# Altium PCB Front Power Distribution.PcbDoc (part 1 of 2)
Units mm, origin at the board's own origin, x right, y up, seen from the top; angles counter-clockwise.
Board outline 77 x 90 mm, 2 copper layers (Top Layer, Bottom Layer); 113 components, 89 nets, 463 pads, 547 vias.
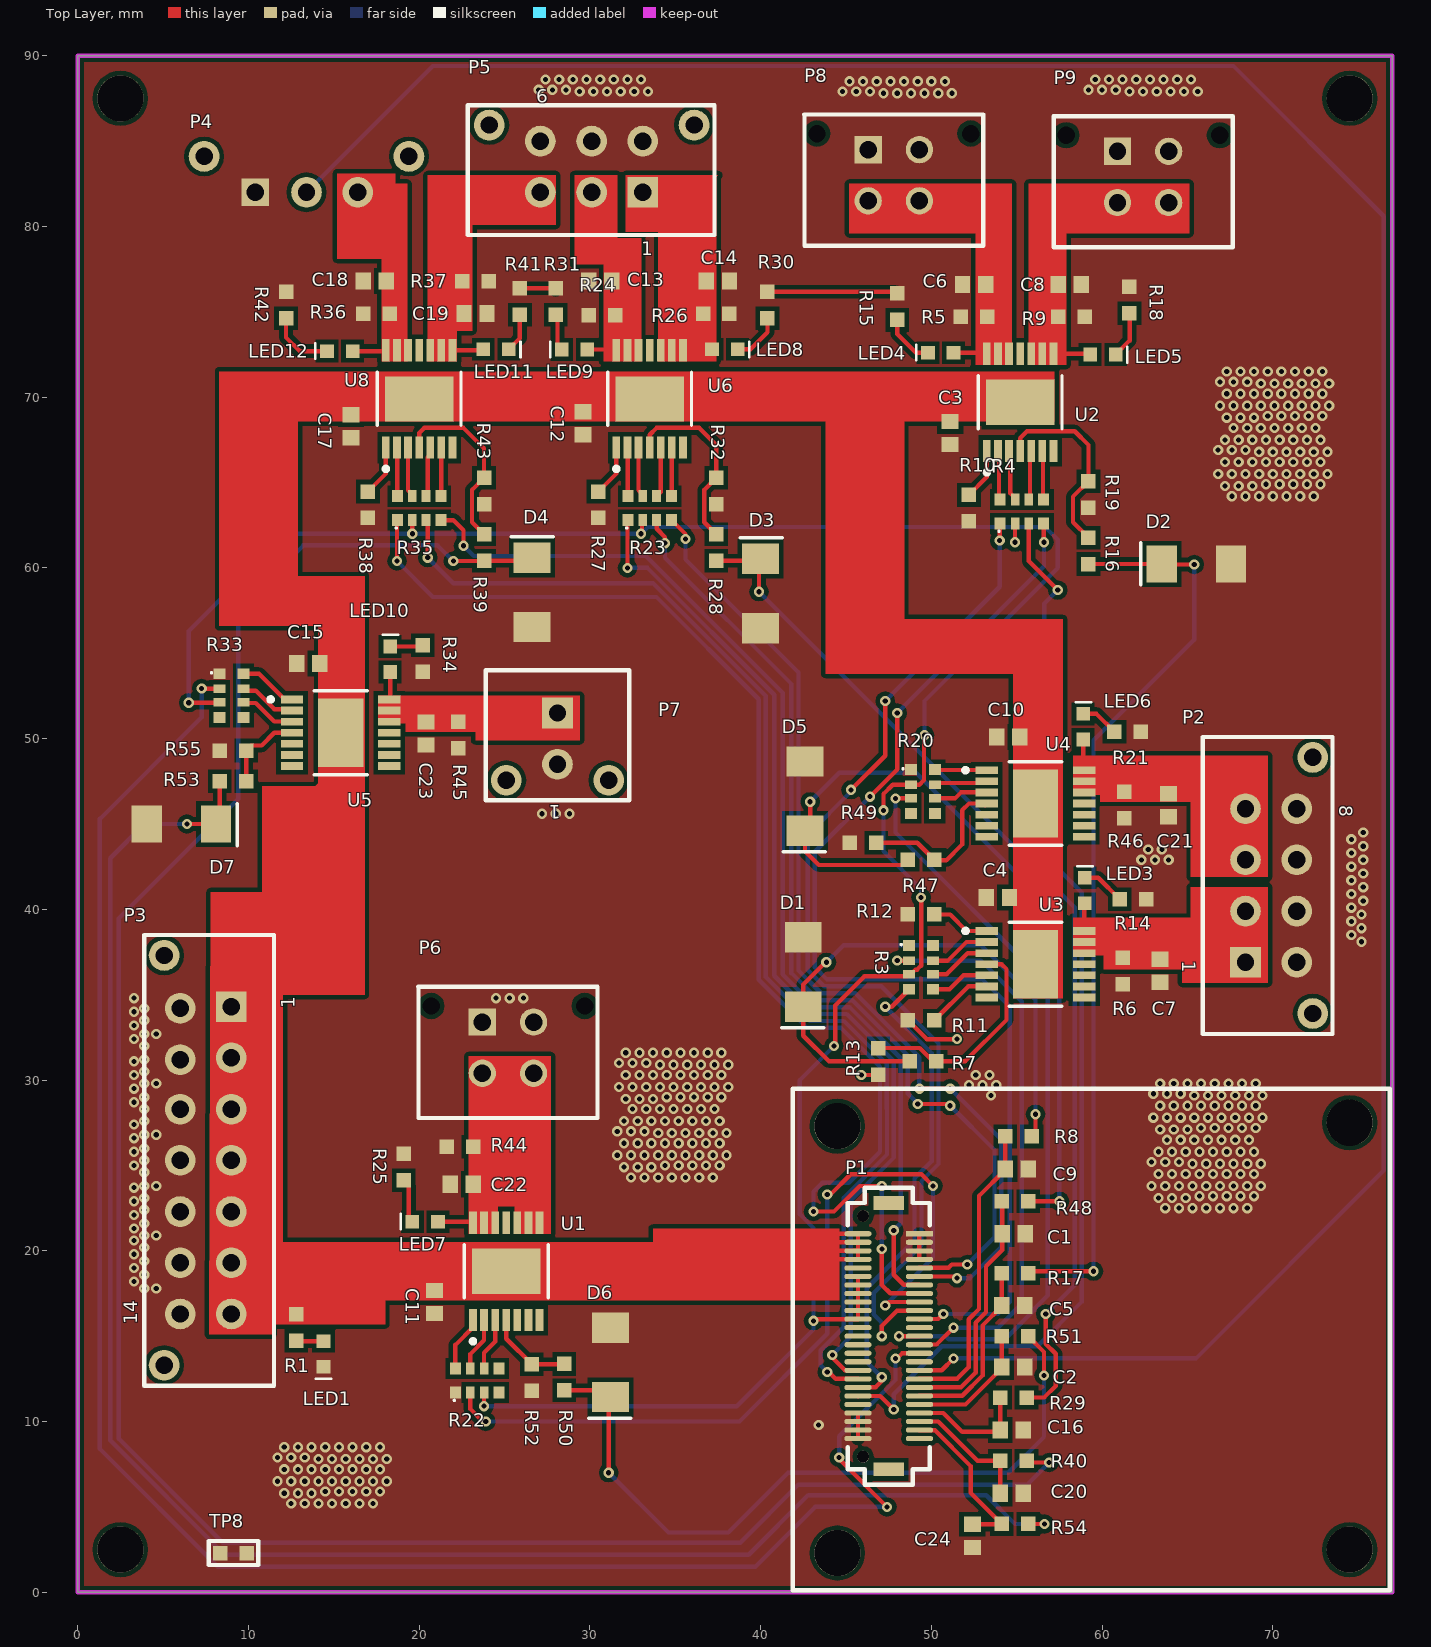
[diagram p0: Top Layer view]
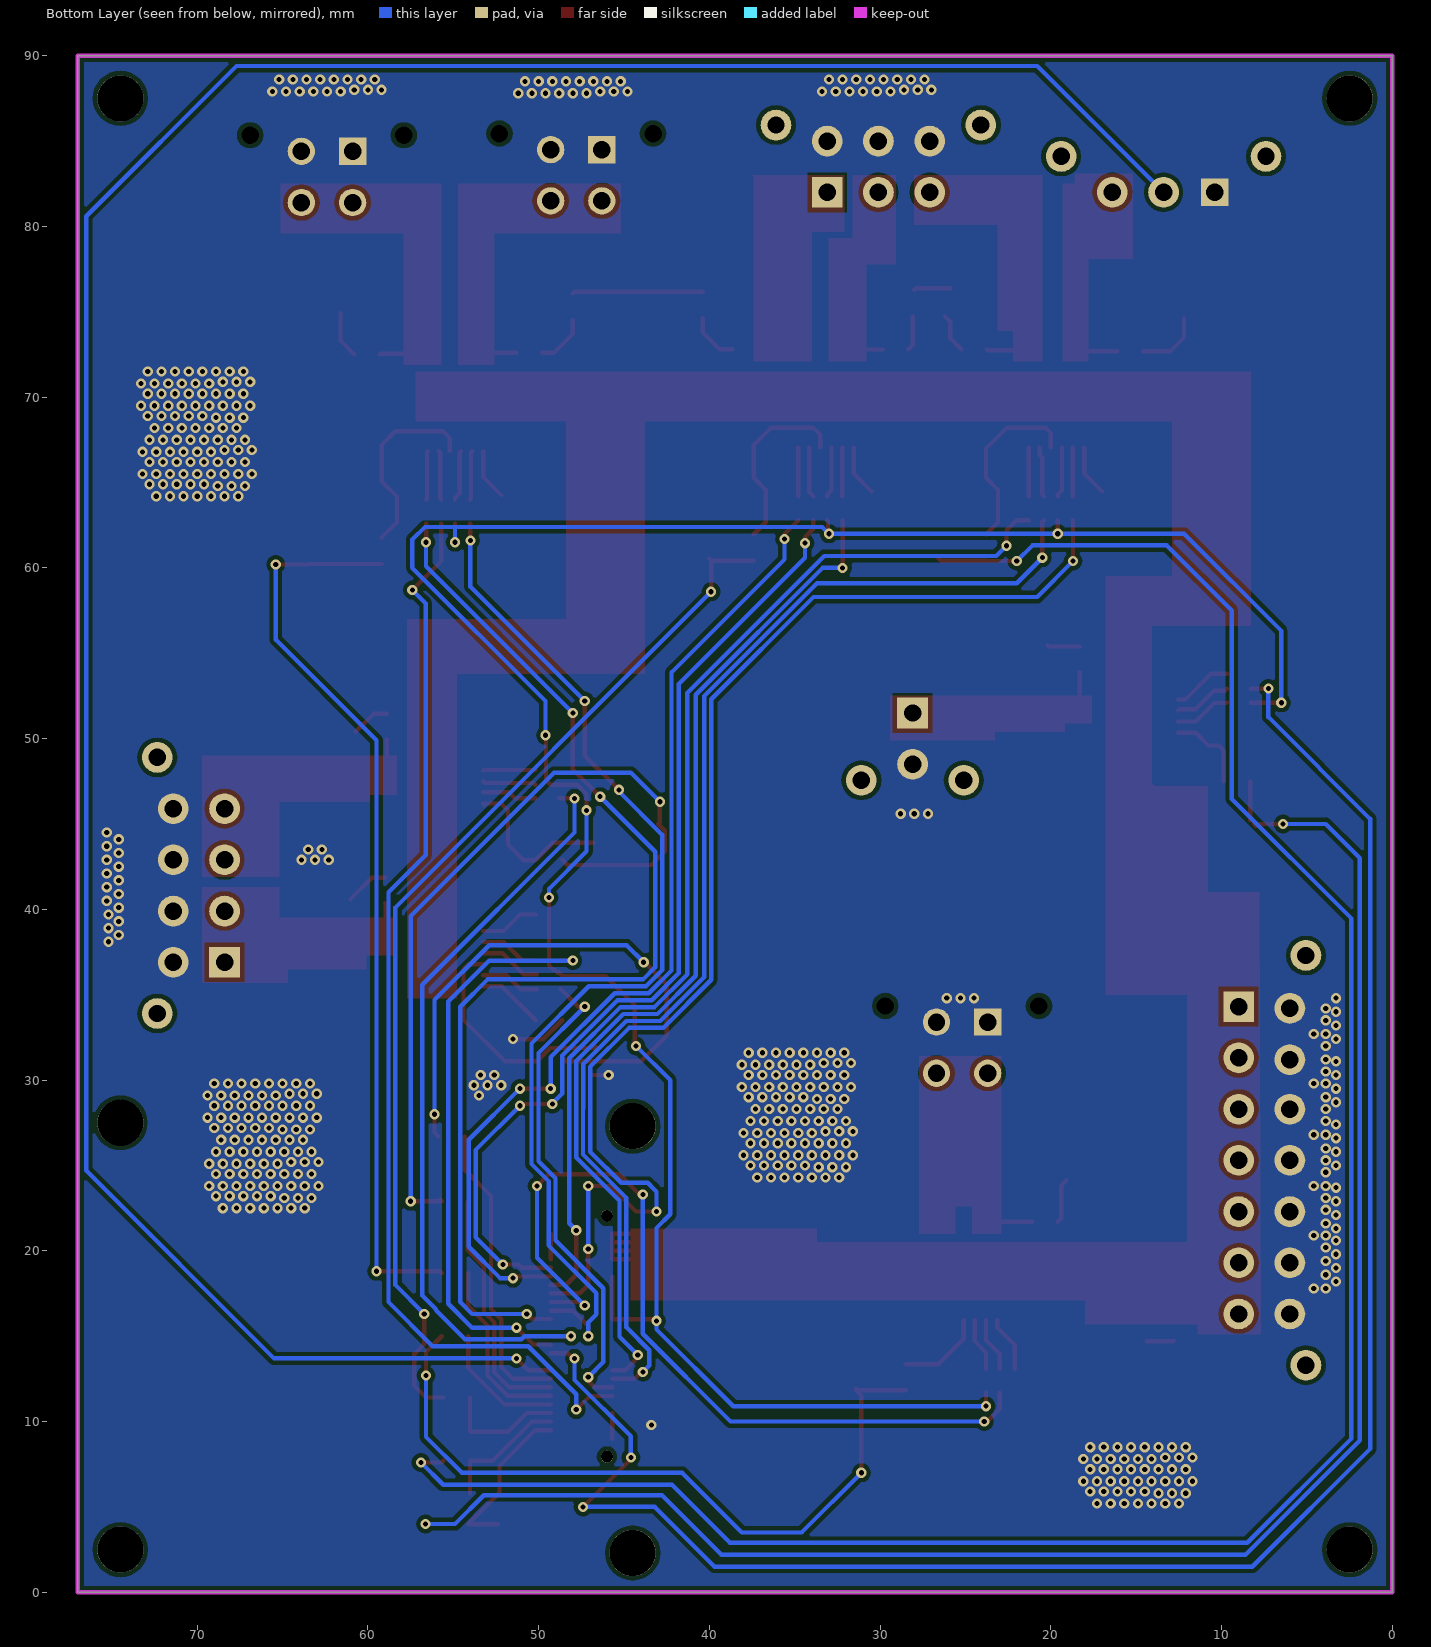
[diagram p1: Bottom Layer view, seen from below]
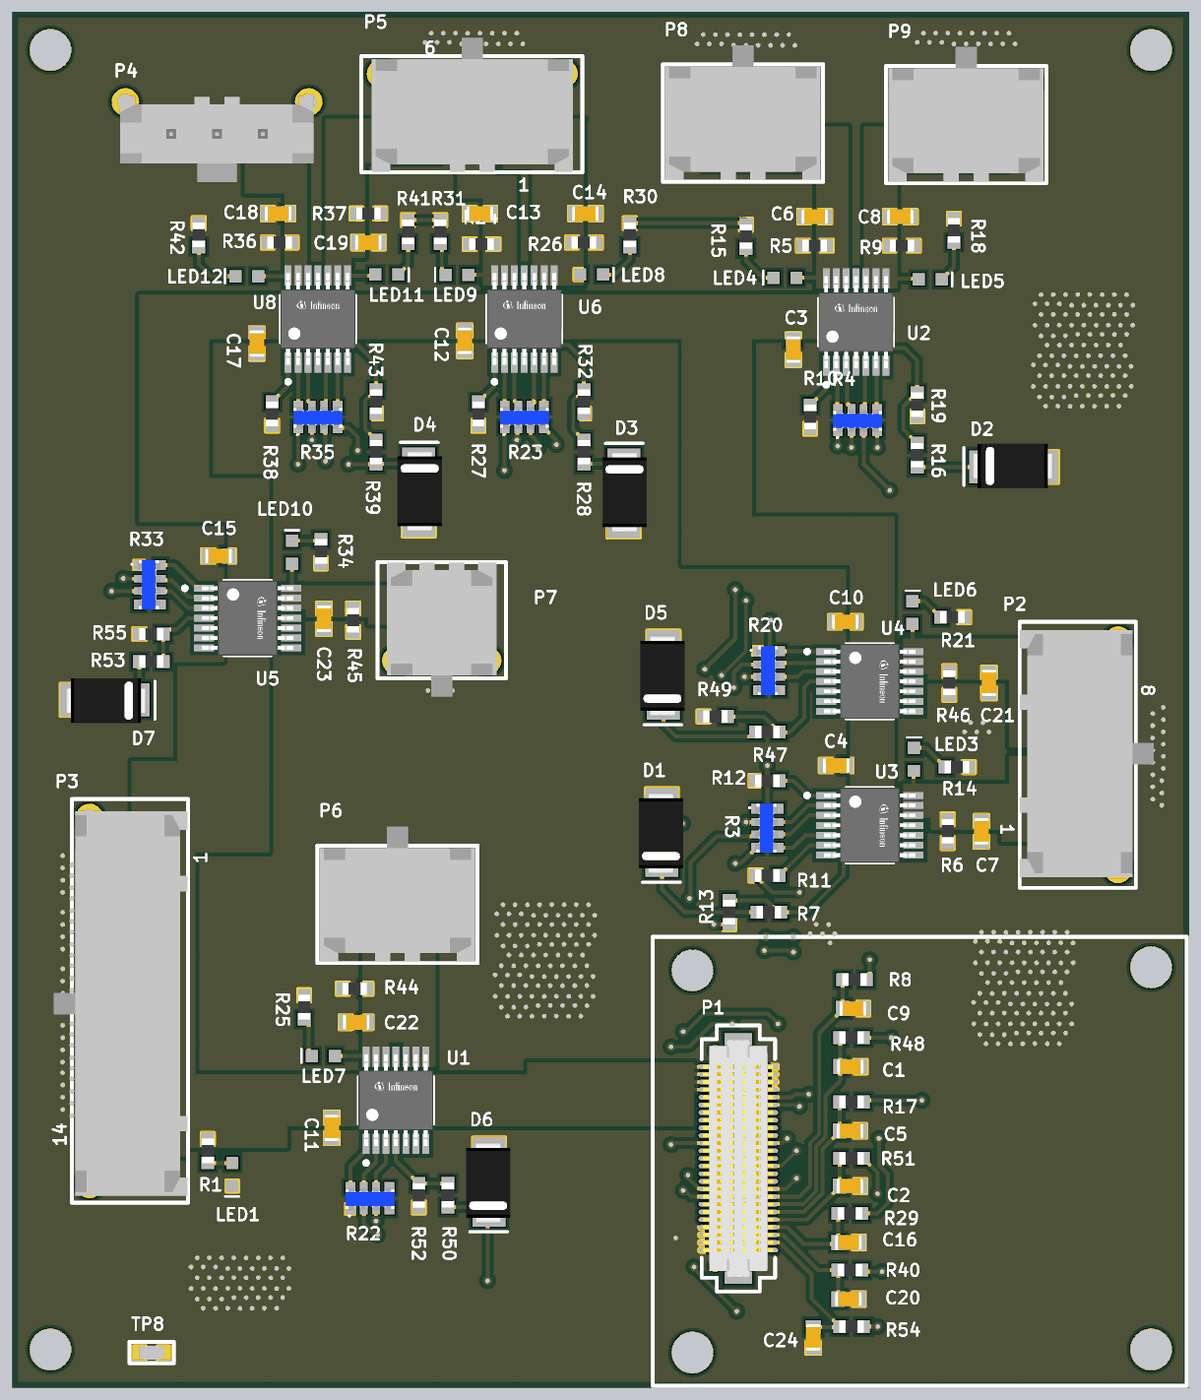
[diagram p2: 3D render of the assembled board from above, using the file's embedded part models]

## Layer stack, top to bottom
Top Solder: solder mask 0.0102, Solder Resist, Dk 3.5
Top Layer: signal copper 0.0356
Dielectric 1: dielectric 0.32, FR-4, Dk 4.8
Bottom Layer: signal copper 0.0356
Bottom Solder: solder mask 0.0102, Solder Resist, Dk 3.5

## Board outline
0,0 77,0 77,90 0,90

## Design rules (kind name [scope] priority, off if disabled: settings)
Clearance [All] p1: gap=0.254 ignorepadtopadclearanceinfootprint=FALSE except(0: Arc-Text Arc-Hole Track-Text Track-Hole SMDPad-Text SMDPad-Hole THPad-Text THPad-Hole Via-Text Via-Hole Fill-Text Fill-Hole Poly-Text Poly-Hole Region-Text Region-Hole Text-Text Text-Hole; 0.152: Arc-Arc Arc-Track Arc-SMDPad Track-Track Track-SMDPad SMDPad-SMDPad)
PolygonConnect [All] p1: connectstyle=Direct reliefconductorwidth=0.254 reliefentries=4 polygonreliefangle="90 Angle" airgapwidth=0.254
RoutingVias [All] p1: holewidth=0.3 width=0.6 viastyle="Through Hole" minholewidth=0.3 minwidth=0.6 maxholewidth=0.3 maxwidth=0.6
SolderMaskExpansion [All] p1: expansion=0.102
Width [All] p1: maxlimit=0.254 minlimit=0.254 preferedwidth=0.254
30 further rules are at their usual default settings.

## Classes and differential pairs
component class "Power Distribution - Steering, Pedal, Center Console, and Fan": C2 C11 C12 C13 C14 C15 C16 C17 C18 C19 C20 C22 C23 C24 D3 D4 D6 D7 LED7 LED8 LED9 LED10 LED11 LED12 P4 P5 P6 P7 R22 R23 R24 R25 R26 R27 R28 R29 R30 R31 R32 R33 R34 R35 R36 R37 R38 R39 R40 R41 R42 R43 R44 R45 R50 R51 R52 R53 R54 R55 U1 U5 U6 U8
component class "Power Distribution - Front Lights": C1 C3 C4 C5 C6 C7 C8 C9 C10 C21 D1 D2 D5 LED3 LED4 LED5 LED6 P2 P8 P9 R3 R4 R5 R6 R7 R8 R9 R10 R11 R12 R13 R14 R15 R16 R17 R18 R19 R20 R21 R46 R47 R48 R49 U2 U3 U4
component class Controller_Board_Interface: LED1 P1 P3 R1 TP8

## Components (designator, comment, footprint, x,y, rotation, side; value= is the part's Value field where it differs from the comment)
C1 "CAP CER 220PF 50V C0G/NP0 0603" "CAP, 0603" 54.825,21 r0 top
C2 "CAP CER 220PF 50V C0G/NP0 0603" "CAP, 0603" 54.8,13.2 r0 top
C3 "CAP CER 0.1UF 50V 10% X7R 0603" "CAP, 0603" 51.1,67.9 r270 top
C4 "CAP CER 0.1UF 50V 10% X7R 0603" "CAP, 0603" 53.9,40.7 r180 top
C5 "CAP CER 220PF 50V C0G/NP0 0603" "CAP, 0603" 54.8,16.8 r0 top
C6 "CAP CER 10nF 50V 5% X7R 0603" "CAP, 0603" 52.5,76.6 r180 top
C7 "CAP CER 10nF 50V 5% X7R 0603" "CAP, 0603" 63.4,36.4 r270 top
C8 "CAP CER 10nF 50V 5% X7R 0603" "CAP, 0603" 58.1,76.6 r0 top
C9 "CAP CER 220PF 50V C0G/NP0 0603" "CAP, 0603" 55,24.8 r0 top
C10 "CAP CER 0.1UF 50V 10% X7R 0603" "CAP, 0603" 54.5,50.1 r180 top
C11 "CAP CER 0.1UF 50V 10% X7R 0603" "CAP, 0603" 20.9,17 r270 top
C12 "CAP CER 0.1UF 50V 10% X7R 0603" "CAP, 0603" 29.6,68.475 r270 top
C13 "CAP CER 10nF 50V 5% X7R 0603" "CAP, 0603" 30.6,76.8 r180 top
C14 "CAP CER 10nF 50V 5% X7R 0603" "CAP, 0603" 37.5,76.8 r0 top
C15 "CAP CER 0.1UF 50V 10% X7R 0603" "CAP, 0603" 13.5,54.4 r180 top
C16 "CAP CER 220PF 50V C0G/NP0 0603" "CAP, 0603" 54.7,9.5 r0 top
C17 "CAP CER 0.1UF 50V 10% X7R 0603" "CAP, 0603" 16,68.3 r270 top
C18 "CAP CER 10nF 50V 5% X7R 0603" "CAP, 0603" 17.4,76.8 r180 top
C19 "CAP CER 10nF 50V 5% X7R 0603" "CAP, 0603" 23.3,74.9 r0 top
C20 "CAP CER 220PF 50V C0G/NP0 0603" "CAP, 0603" 54.7,5.8 r0 top
C21 "CAP CER 10nF 50V 5% X7R 0603" "CAP, 0603" 63.9,46.1 r270 top
C22 "CAP CER 10nF 50V 5% X7R 0603" "CAP, 0603" 22.5,23.9 r180 top
C23 "CAP CER 10nF 50V 5% X7R 0603" "CAP, 0603" 20.4,50.3 r270 top
C24 "CAP CER 220PF 50V C0G/NP0 0603" "CAP, 0603" 52.4,3.3 r270 top
D1 "DIODE ZENER 5.1V 500MW SOD123" "DO-214AA Diode" 42.5,38.364 r270 top
D2 "DIODE ZENER 5.1V 500MW SOD123" "DO-214AA Diode" 67.553,60.225 r180 top
D3 "DIODE ZENER 5.1V 500MW SOD123" "DO-214AA Diode" 40,56.472 r90 top
D4 "DIODE ZENER 5.1V 500MW SOD123" "DO-214AA Diode" 26.6,56.536 r90 top
D5 "DIODE ZENER 5.1V 500MW SOD123" "DO-214AA Diode" 42.6,48.664 r270 top
D6 "DIODE ZENER 5.1V 500MW SOD123" "DO-214AA Diode" 31.2,15.5 r270 top
D7 "DIODE ZENER 5.1V 500MW SOD123" "DO-214AA Diode" 4.036,45 r0 top
LED1 "LED GREEN CLEAR 2V 0603" LED_0603 14.39,14.65 r270 top
LED3 "LED YELLOW CLEAR 2.1V 0603" LED_0603 59,40.4 r90 top
LED4 "LED YELLOW CLEAR 2.1V 0603" LED_0603 51.25,72.61 r180 top
LED5 "LED YELLOW CLEAR 2.1V 0603" LED_0603 59.35,72.49 r0 top
LED6 "LED YELLOW CLEAR 2.1V 0603" LED_0603 58.9,50 r90 top
LED7 "LED YELLOW CLEAR 2.1V 0603" LED_0603 21.05,21.71 r180 top
LED8 "LED YELLOW CLEAR 2.1V 0603" LED_0603 37.2,72.8 r0 top
LED9 "LED YELLOW CLEAR 2.1V 0603" LED_0603 29.8,72.8 r180 top
LED10 "LED YELLOW CLEAR 2.1V 0603" LED_0603 18.31,53.95 r90 top
LED11 "LED YELLOW CLEAR 2.1V 0603" LED_0603 23.8,72.8 r0 top
LED12 "LED YELLOW CLEAR 2.1V 0603" LED_0603 16.05,72.71 r180 top
P1 "CONN 50POS Bergstak Plug 0.02\"" "CONN, Bergstak 50 Pos Plug" 47.5,15 r0 top
P2 "CONN 8POS MICRO-FIT 3mm" "CONN, 8POS MICRO-FIT" 68.4,36.9 r270 top
P3 "CONN 14POS MICRO-FIT 3mm" "CONN, 14POS MICRO-FIT 3mm" 9,34.3 r90 top
P4 "CONN 3POS MICROFIT" "CONN, 3 POS MICROFIT" 13.4,82 r90 top
P5 "CONN 6POS MICRO-FIT 3mm" "CONN, 6POS MICRO-FIT 3MM" 33.1,82 r0 top
P6 "CONN 4POS MICRO-FIT 3mm" "CONN 4POS MICROFIT (2x2)" 26.7,30.4 r0 top
P7 "CONN 2POS MICRO-FIT 3mm" "CONN, 2POS MICRO-FIT" 28.1,51.5 r180 top
P8 "CONN 4POS MICRO-FIT 3mm" "CONN 4POS MICROFIT (2x2)" 49.3,81.5 r0 top
P9 "CONN 4POS MICRO-FIT 3mm" "CONN 4POS MICROFIT (2x2)" 63.9,81.4 r0 top
R1 "RES 4.7K OHM 1% 1/10W 0603" "RES, 0603" 12.8,15.5 r270 top
R3 "RES ARRAY 4 RES 4.7K OHM 1206" "RES ARRAY 4RES 1206" 49.4,36.6 r0 top
R4 "RES ARRAY 4 RES 4.7K OHM 1206" "RES ARRAY 4RES 1206" 55.3,63.3 r90 top
R5 "RES 47K OHM 1% 1/10W 0603" "RES, 0603" 52.5,74.7 r180 top
R6 "RES 47K OHM 1% 1/10W 0603" "RES, 0603" 61.2,36.4 r270 top
R7 "RES 4.7K OHM 1% 1/10W 0603" "RES, 0603" 49.5,31.1 r0 top
R8 "RES 4.7K OHM 1% 1/10W 0603" "RES, 0603" 55.1,26.7 r0 top
R9 "RES 47K OHM 1% 1/10W 0603" "RES, 0603" 58.2,74.7 r0 top
R10 "RES 47K OHM 1% 1/10W 0603" "RES, 0603" 52.2,63.5 r270 top
R11 "RES 10K OHM 1% 1/10W 0603" "RES, 0603" 49.4,33.504 r180 top
R12 "RES 47K OHM 1% 1/10W 0603" "RES, 0603" 49.4,39.7 r180 top
R13 "RES 1.21K OHM 1% 1/10W 0603" "RES, 0603" 46.9,31.1 r270 top
R14 "RES 10K OHM 1% 1/10W 0603" "RES, 0603" 61.8,40.6 r0 top
R15 "RES 10K OHM 1% 1/10W 0603" "RES, 0603" 48,75.3 r90 top
R16 "RES 4.7K OHM 1% 1/10W 0603" "RES, 0603" 59.2,61 r90 top
R17 "RES 4.7K OHM 1% 1/10W 0603" "RES, 0603" 54.9,18.7 r0 top
R18 "RES 10K OHM 1% 1/10W 0603" "RES, 0603" 61.6,75.7 r90 top
R19 "RES 1.21K OHM 1% 1/10W 0603" "RES, 0603" 59.2,64.3 r270 top
R20 "RES ARRAY 4 RES 4.7K OHM 1206" "RES ARRAY 4RES 1206" 49.5,46.9 r0 top
R21 "RES 10K OHM 1% 1/10W 0603" "RES, 0603" 61.5,50.4 r0 top
R22 "RES ARRAY 4 RES 4.7K OHM 1206" "RES ARRAY 4RES 1206" 23.4,12.4 r90 top
R23 "RES ARRAY 4 RES 4.7K OHM 1206" "RES ARRAY 4RES 1206" 33.5,63.5 r90 top
R24 "RES 47K OHM 1% 1/10W 0603" "RES, 0603" 30.7,74.8 r180 top
R25 "RES 10K OHM 1% 1/10W 0603" "RES, 0603" 19.1,24.9 r90 top
R26 "RES 47K OHM 1% 1/10W 0603" "RES, 0603" 37.4,74.9 r0 top
R27 "RES 47K OHM 1% 1/10W 0603" "RES, 0603" 30.5,63.7 r270 top
R28 "RES 4.7K OHM 1% 1/10W 0603" "RES, 0603" 37.4,61.2 r90 top
R29 "RES 4.7K OHM 1% 1/10W 0603" "RES, 0603" 54.8,11.404 r0 top
R30 "RES 10K OHM 1% 1/10W 0603" "RES, 0603" 40.4,75.4 r90 top
R31 "RES 10K OHM 1% 1/10W 0603" "RES, 0603" 28,75.6 r90 top
R32 "RES 1.21K OHM 1% 1/10W 0603" "RES, 0603" 37.4,64.5 r270 top
R33 "RES ARRAY 4 RES 4.7K OHM 1206" "RES ARRAY 4RES 1206" 9,52.52 r0 top
R34 "RES 10K OHM 1% 1/10W 0603" "RES, 0603" 20.2,54.7 r270 top
R35 "RES ARRAY 4 RES 4.7K OHM 1206" "RES ARRAY 4RES 1206" 20,63.5 r90 top
R36 "RES 47K OHM 1% 1/10W 0603" "RES, 0603" 17.5,74.9 r180 top
R37 "RES 47K OHM 1% 1/10W 0603" "RES, 0603" 23.3,76.8 r0 top
R38 "RES 47K OHM 1% 1/10W 0603" "RES, 0603" 17,63.7 r270 top
R39 "RES 4.7K OHM 1% 1/10W 0603" "RES, 0603" 23.8,61.2 r90 top
R40 "RES 4.7K OHM 1% 1/10W 0603" "RES, 0603" 54.8,7.7 r0 top
R41 "RES 10K OHM 1% 1/10W 0603" "RES, 0603" 25.9,75.6 r90 top
R42 "RES 10K OHM 1% 1/10W 0603" "RES, 0603" 12.2,75.4 r90 top
R43 "RES 1.21K OHM 1% 1/10W 0603" "RES, 0603" 23.8,64.5 r270 top
R44 "RES 47K OHM 1% 1/10W 0603" "RES, 0603" 22.4,26.1 r180 top
R45 "RES 47K OHM 1% 1/10W 0603" "RES, 0603" 22.3,50.2 r270 top
R46 "RES 47K OHM 1% 1/10W 0603" "RES, 0603" 61.3,46.1 r270 top
R47 "RES 4.7K OHM 1% 1/10W 0603" "RES, 0603" 49.4,42.9 r0 top
R48 "RES 4.7K OHM 1% 1/10W 0603" "RES, 0603" 54.9,22.9 r0 top
R49 "RES 1.21K OHM 1% 1/10W 0603" "RES, 0603" 46,43.9 r180 top
R50 "RES 4.7K OHM 1% 1/10W 0603" "RES, 0603" 28.5,12.6 r90 top
R51 "RES 4.7K OHM 1% 1/10W 0603" "RES, 0603" 54.9,15 r0 top
R52 "RES 1.21K OHM 1% 1/10W 0603" "RES, 0603" 26.6,12.575 r270 top
R53 "RES 4.7K OHM 1% 1/10W 0603" "RES, 0603" 9.1,47.5 r0 top
R54 "RES 4.7K OHM 1% 1/10W 0603" "RES, 0603" 54.904,4 r0 top
R55 "RES 1.21K OHM 1% 1/10W 0603" "RES, 0603" 9.1,49.3 r180 top
TP8 "Test Point 0603 SMD" "TEST POINT 0603 SMD" 8.35,2.3 r0 top
U1 "IC LOAD SWITCH BTS70081EPPXUMA1" "IC LOAD SWITCH PG-TSDSO-14-22" 25.1,18.8 r90 top
U2 "IC LOAD SWITCH BTS7200-2EPA PG-TSDSO-14_1" "IC LOAD SWITCH PG-TSDSO-14-22" 55.2,69.7 r90 top
U3 "IC LOAD SWITCH BTS7200-2EPA PG-TSDSO-14_1" "IC LOAD SWITCH PG-TSDSO-14-22" 56.1,36.787 r0 top
U4 "IC LOAD SWITCH BTS70401EPA PG-TSDSO-14-22" "IC LOAD SWITCH PG-TSDSO-14-22" 56.1,46.2 r0 top
U5 "IC LOAD SWITCH BTS70401EPA PG-TSDSO-14-22" "IC LOAD SWITCH PG-TSDSO-14-22" 15.4,50.344 r0 top
U6 "IC LOAD SWITCH BTS7200-2EPA PG-TSDSO-14_1" "IC LOAD SWITCH PG-TSDSO-14-22" 33.5,69.9 r90 top
U8 "IC LOAD SWITCH BTS7200-2EPA PG-TSDSO-14_1" "IC LOAD SWITCH PG-TSDSO-14-22" 20,69.9 r90 top

## Footprints (in the part's own frame and the unit in brackets; to place one, negate y for a bottom-side part, rotate by r counter-clockwise, add the part's x,y. Pads: shape width x height; smd on the part's side, far side on the other; paste and mask are expansions set on the pad)
"CAP, 0603" [mm] "Chip Capacitor, 2-Leads, Body 1.60x0.81mm, IPC Medium Density"
  rect 0.9x1 smd mask+0.076: 1(-0.675,0) 2(0.675,0)
  body extent -0.87,-0.48 0.87,0.48, height 0.9
"CONN 4POS MICROFIT (2x2)" [mm]
  round 1.6 hole 1.02: 1(0,0) 2(-3,0) 3(0,3)
  rect 1.6x1.6 hole 1.02: 4(-3,3)
  round 0 hole 1.02: ""(-6,3.94) ""(3,3.94)
  silkscreen extent -6.75,-2.63 3.75,5.06, body extent -6.57,-2.47 3.57,6.29, height 9.91
"CONN, 2POS MICRO-FIT" [mm]
  round 1.8 hole 1.02: 0(-3,3.94) 0(3,3.94) 2(0,3)
  rect 1.8x1.8 hole 1.02: 1(0,0)
  silkscreen extent -4.2,-2.5 4.2,5.1, body extent -3.57,-2.47 3.58,6.3, height 9.95
"CONN, 3 POS MICROFIT" [mm]
  round 1.8 hole 1.02: 0(2.1,6) 0(2.1,-6) 2(0,0) 3(0,-3)
  rect 1.6x1.6 hole 1.02: 1(0,3)
  body extent -3.14,-6.32 2.47,6.33, height 9.95
"CONN, 6POS MICRO-FIT 3MM" [mm]
  round 1.8 hole 1.02: 0(-9,3.94) 0(3,3.94) 2(-3,0) 3(-6,0) 4(0,3) 5(-3,3) 6(-6,3)
  rect 1.8x1.8 hole 1.02: 1(0,0)
  silkscreen extent -10.25,-2.5 4.2,5.1, body extent -9.57,-2.47 3.58,6.3, height 10.15
"CONN, 8POS MICRO-FIT" [mm]
  round 1.8 hole 1.02: 0(-12,3.94) 0(3,3.94) 2(-3,0) 3(-6,0) 4(-9,0) 5(0,3) 6(-3,3) 7(-6,3) 8(-9,3)
  rect 1.8x1.8 hole 1.02: 1(0,0)
  silkscreen extent -13.2,-2.5 4.2,5.1, body extent -12.65,-2.48 3.5,6.29, height 9.95
"CONN, 14POS MICRO-FIT 3mm" [mm]
  round 1.8 hole 1.02: 0(-21,3.94) 0(3,3.94) 2(-3,0) 3(-6,0) 4(-9,0) 5(-12,0) 6(-15,0) 7(-18,0) 8(-0.1,3) 9(-3.1,3) 10(-6,3) 11(-9,3) 12(-12,3) 13(-15,3) 14(-18,3)
  rect 1.8x1.8 hole 1.02: 1(0,0)
  silkscreen extent -22.2,-2.5 4.2,5.1, body extent -21.75,-2.48 3.4,6.28, height 9.95
"CONN, Bergstak 50 Pos Plug" [mm] "Bergstak 50 Position Plug"
  rect 1.6x0.3 smd: 1(1.8,6)
  oval 1.6x0.3 smd: 2(1.8,5.5) 3(1.8,5) 4(1.8,4.5) 5(1.8,4) 6(1.8,3.5) 7(1.8,3) 8(1.8,2.5) 9(1.8,2) 10(1.8,1.5) 11(1.8,1) 12(1.8,0.5) 13(1.8,0) 14(1.8,-0.5) 15(1.8,-1) 16(1.8,-1.5) 17(1.8,-2) 18(1.8,-2.5) 19(1.8,-3) 20(1.8,-3.5) 21(1.8,-4) 22(1.8,-4.5) 23(1.8,-5) 24(1.8,-5.5) 25(1.8,-6) 26(-1.8,-6) 27(-1.8,-5.5) 28(-1.8,-5) 29(-1.8,-4.5) 30(-1.8,-4) 31(-1.8,-3.5) 32(-1.8,-3) 33(-1.8,-2.5) 34(-1.8,-2) 35(-1.8,-1.5) 36(-1.8,-1) 37(-1.8,-0.5) 38(-1.8,0) 39(-1.8,0.5) 40(-1.8,1) 41(-1.8,1.5) 42(-1.8,2) 43(-1.8,2.5) 44(-1.8,3) 45(-1.8,3.5) 46(-1.8,4) 47(-1.8,4.5) 48(-1.8,5) 49(-1.8,5.5) 50(-1.8,6)
  round 0.7 hole 0.7: ""(-1.5,-7.05) ""(-1.5,7.05)
  rect 1.8x0.8 smd: ""(0,-7.8) ""(0,7.8)
  silkscreen extent -2.4,-8.7 2.4,8.7, body extent -2.3,-7.75 2.3,7.75, height 4.2
"DO-214AA Diode" [mil] "Zener Diode 16V 5W SMBJ5353B-TP"
  rect 70x85 smd: 1(0,0) 2(160,0)
  silkscreen extent 209,-50 209,47, body extent -21,-60 187,55, height 95
"IC LOAD SWITCH PG-TSDSO-14-22" [mm] "SOP,0.65mm pitch;14 pin,3.90mm W X 4.90mm L X 1.15mm H body (w/thermal tab)"
  rect 1.31x0.45 smd paste+0 mask+0: 1(-2.85,1.95) 2(-2.85,1.3) 3(-2.85,0.65) 4(-2.85,0) 5(-2.85,-0.65) 6(-2.85,-1.3) 7(-2.85,-1.95) 8(2.85,-1.95) 9(2.85,-1.3) 10(2.85,-0.65) 11(2.85,0) 12(2.85,0.65) 13(2.85,1.3) 14(2.85,1.95)
  rect 2.65x4 smd paste-2.65 mask+0: 15(0,0)
  silkscreen extent -4.22,-2.45 1.55,2.45, body extent -3,-2.45 3,2.45, height 1.16
LED_0603 [mm]
  rect 0.8x0.8 smd: 1(-0.05,0.01) 2(1.45,0.01)
  silkscreen extent 2.13,-0.46 2.13,0.45, body extent -0.09,-0.39 1.51,0.41, height 0.8
"RES ARRAY 4RES 1206" [mm] "Chip Array, Flat, 8-Leads, Pitch 0.80mm,  Body 3.20x1.60mm,  IPC Medium Density"
  rect 0.7x0.64 smd: 1(-0.7,1.28) 4(-0.7,-1.28) 5(0.7,-1.28) 8(0.7,1.28)
  rect 0.7x0.5 smd: 2(-0.7,0.4) 3(-0.7,-0.4) 6(0.7,-0.4) 7(0.7,0.4)
  silkscreen extent -1.21,1.29 -1.11,1.39, body extent -0.81,-1.6 0.69,1.6, height 0.45
"RES, 0603" [mm] "Chip Resistor, 2-Leads, Body 1.60x0.80mm, IPC Medium Density"
  rect 0.85x0.85 smd: 1(-0.775,0) 2(0.775,0)
  body extent -0.8,-0.4 0.8,0.4, height 0.55
"TEST POINT 0603 SMD" [mm]
  rect 0.85x0.85 smd paste-2 mask+0.102: 1(0,0)
  rect 0.85x0.85 smd paste-2: 1(1.55,0)
  silkscreen extent -0.67,-0.7 2.22,0.7, body extent -0.02,-0.45 1.58,0.45, height 1.09

## Part data
C1 C2 C5 C9 C16 C20 C24: "220pF ±5% 50V Ceramic Capacitor C0G, NP0 0603 (1608 Metric)", Capacitance=220pF, Case/Package=0603, Case Code (Metric)=1608, Dielectric=C0G, Dielectric Material=Ceramic, Manufacturer=KEMET, Manufacturer Part Number=C0603C221J5GACAUTO, Max Operating Temperature=125°C, Min Operating Temperature=-55°C, Package Quantity=1, Ratings=AEC-Q200, Supplier Part Number 1=399-6868-1-ND, Tolerance=5%, Voltage Rating=50V, Case Code (Imperial)=0603, ComponentLink1Description=https://datasheet.ciiva.com/18192/getdatasheetpartid-416741-18192869.pdf?src-supplier=Verical, ComponentLink1URL=https://datasheet.ciiva.com/18192/getdatasheetpartid-416741-18192869.pdf?src-supplier=Verical, ComponentLink2Description=https://datasheet.ciiva.com/22694/1633156-22694015.pdf?src-supplier=Element14, ComponentLink2URL=https://datasheet.ciiva.com/22694/1633156-22694015.pdf?src-supplier=Element14, Contact Plating=Tin, Depth=0.8mm, Dissipation Factor=0.1%, Height=0.8mm, Lead Free="Lead Free", Length=1.6mm, Mount="Surface Mount", Packaging="Tape and Reel", Pricing 1="1=0.14000, 10=0.09700, 100=0.04550, 500=0.03188, 1000=0.02640 (USD)", Radiation Hardening=No, REACH SVHC="No SVHC", RoHS=Yes, Stock 1=35170, Supplier 1=Digi-Key, Termination=SMD/SMT, Thickness=0.034inch, Voltage Rating (DC)=50V, Width=0.031inch
C3 C4 C10 C11 C12 C15 C17: "0.10μF ±10% 50V Ceramic Capacitor X7R 0603 (1608 Metric)", Capacitance=0.1μF, Manufacturer 1="AVX Corporation", Manufacturer Part Number 1=06035C104KAT2A, Operating Temperature="-55°C ~ 125°C", Package / Case="0603 (1608 Metric)", Ratings=-, Supplier Part Number 1=478-5052-1-ND, Temperature Coefficient=X7R, Tolerance=±10%, Voltage=50V, ComponentLink1Description=http://datasheets.avx.com/X7RDielectric.pdf, ComponentLink1URL=http://datasheets.avx.com/X7RDielectric.pdf, Height - Seated (Max)=-, Lead Spacing=-, Lead Style=-, Mounting Type="Surface Mount, MLCC", Packaging="Cut Tape (CT)", Part Status=Active, Size / Dimension="0.063\" L x 0.032\" W (1.60mm x 0.81mm)", Supplier 1=Digi-Key, Thickness (Max)="0.035\" (0.90mm)"
C6 C7 C8 C13 C14 C18 C19 C21 C22 C23: "10000pF ±5% 50V Ceramic Capacitor U2J 0603 (1608 Metric)", Capacitance=10000pF, Manufacturer 1=KEMET, Manufacturer Part Number 1=C0603C103J5JAC7867, Operating Temperature="-55°C ~ 125°C", Package / Case="0603 (1608 Metric)", Ratings=-, Supplier Part Number 1=399-13384-1-ND, Temperature Coefficient=U2J, Tolerance=±5%, Voltage=50V, ComponentLink1Description=http://www.kemet.com/docfinder?Partnumber=C0603C103J5JAC7867, ComponentLink1URL=http://www.kemet.com/docfinder?Partnumber=C0603C103J5JAC7867, Failure Rate=-, Height - Seated (Max)=-, Lead Spacing=-, Lead Style=-, Mounting Type="Surface Mount, MLCC", Packaging="Cut Tape (CT)", Part Status=Active, Size / Dimension="0.063\" L x 0.032\" W (1.60mm x 0.80mm)", Supplier 1=Digi-Key, Thickness (Max)="0.034\" (0.87mm)"
D1 D2 D3 D4 D5 D6 D7: Supplier Part Number 1=MMSZ5231BT1GOSCT-ND, Voltage - Zener (Nom) (Vz)=5.1V, Supplier 1=Digi-Key
LED1: "Green 572nm LED Indication - Discrete 2V 0603 (1608 Metric)", Color=Green, Current - Test=20mA, Lens Color=Colorless, Manufacturer="Wurth Electronics Inc.", Manufacturer Part Number=150060VS75000, Millicandela Rating=40mcd, Package / Case="0603 (1608 Metric)", Supplier Device Package=0603, Supplier Part Number 1=732-4980-1-ND, Voltage - Forward (Vf) (Typ)=2V, Category=Optoelectronics, ComponentLink1Description=http://katalog.we-online.de/led/datasheet/150060VS75000.pdf, ComponentLink1URL=http://katalog.we-online.de/led/datasheet/150060VS75000.pdf, Features=-, Height (Max)=0.80mm, Lens Style/Size="Rectangle with Flat Top, 1.10mm x 0.70mm", Lens Transparency=Clear, Mounting Type="Surface Mount", Packaging="Cut Tape (CT)", Part Status=Active, Pricing 1="1=0.21, 100=0.1617, 500=0.13964 (CAD)", RoHS="RoHS Compliant", Size / Dimension="1.60mm L x 0.80mm W", Stock 1=9408, Supplier 1=Digi-Key, Viewing Angle=140°, Wavelength - Dominant=570nm, Wavelength - Peak=572nm
LED3 LED4 LED5 LED6 LED7 LED8 LED9 LED10 LED11 LED12: "Yellow 590nm LED Indication - Discrete 2V 0603 (1608 Metric)", Color=Yellow, Current - Test=20mA, Lens Color=Colorless, Manufacturer="Wurth Electronics Inc.", Manufacturer Part Number=150060YS75000, Millicandela Rating=120mcd, Package / Case="0603 (1608 Metric)", Supplier Device Package=0603, Supplier Part Number 1=732-4981-1-ND, Voltage - Forward (Vf) (Typ)=2V, Category=Optoelectronics, ComponentLink1Description=http://katalog.we-online.de/led/datasheet/150060YS75000.pdf, ComponentLink1URL=http://katalog.we-online.de/led/datasheet/150060YS75000.pdf, Features=-, Height (Max)=0.80mm, Lens Style/Size="Rectangle with Flat Top, 1.10mm x 0.70mm", Lens Transparency=Clear, Mounting Type="Surface Mount", Packaging="Cut Tape (CT)", Part Status=Active, Pricing 1="1=0.21, 100=0.1617, 500=0.13964 (CAD)", RoHS="RoHS Compliant", Size / Dimension="1.60mm L x 0.80mm W", Stock 1=10523, Supplier 1=Digi-Key, Viewing Angle=140°, Wavelength - Dominant=590nm, Wavelength - Peak=595nm
P1: "50 Position Connector Plug, Outer Shroud Contacts Surface Mount Gold", Manufacturer 1="Amphenol FCI", Manufacturer Part Number 1=10132797-055100LF, Supplier Part Number 1=609-5226-1-ND, ComponentLink1Description=http://portal.fciconnect.com/Comergent//fci/drawing/10132797.pdf, ComponentLink1URL=http://portal.fciconnect.com/Comergent//fci/drawing/10132797.pdf, Connector Type="Plug, Outer Shroud Contacts", Contact Finish=Gold, Contact Finish Thickness="1μin (0.025μm)", Height Above Board="0.169\" (4.30mm)", Mated Stacking Heights=5mm, Mounting Type="Surface Mount", Number of Positions=50, Number of Rows=2, Packaging="Cut Tape (CT)", Part Status=Active, Pitch="0.020\" (0.50mm)", Series="BergStak Plug", Supplier 1=Digi-Key
P2: "Connector Header Through Hole 6 position 0.118\" (3.00mm)", Current Rating=-, Insulation Color=Black, Manufacturer="Molex, LLC", Manufacturer Part Number=0430450827, Material Flammability Rating="UL94 V-0", Supplier Part Number 1=WM10684-ND, Applications="General Purpose, Medical, Military, Telecommunications", Category="Connectors, Interconnects", ComponentLink1Description=https://www.molex.com/pdm_docs/ps/PS-43045.pdf, ComponentLink1URL=https://www.molex.com/pdm_docs/ps/PS-43045.pdf, ComponentLink2Description=https://www.molex.com/webdocs/datasheets/pdf/en-us/0430450827_PCB_HEADERS.pdf, ComponentLink2URL=https://www.molex.com/webdocs/datasheets/pdf/en-us/0430450827_PCB_HEADERS.pdf, Connector Type=Header, Contact Finish - Mating=Tin, Contact Finish - Post=Tin, Contact Finish Thickness - Mating="60.0μin (1.52μm)", Contact Finish Thickness - Post=-, Contact Length - Mating=-, Contact Length - Post="0.125\" (3.18mm)", Contact Material=Brass, Contact Shape=Square, Contact Type="Male Pin", Fastening Type="Locking Ramp", Features="Board Guide", Ingress Protection=-, Insulation Height="0.390\" (9.91mm)", Insulation Material="Liquid Crystal Polymer (LCP), Glass Filled", Mated Stacking Heights=-, Mounting Type="Through Hole", Number of Positions=6, Number of Positions Loaded=All, Number of Rows=2, Operating Temperature=-, Overall Contact Length=-, Packaging=Tray, Part Status=Active, Pitch - Mating="0.118\" (3.00mm)", Pricing 1="1=2.69, 10=2.445, 25=2.2964, 50=2.1964, 100=2.0965, 250=1.8968, 500=1.74704, 1440=1.49746, 2880=1.39763 (CAD)", RoHS="RoHS Compliant", Row Spacing - Mating="0.118\" (3.00mm)", Shrouding="Shrouded - 4 Wall", Stock 1=5553, Style="Board to Cable/Wire", Supplier 1=Digi-Key, Termination=Solder, Voltage Rating=-
P3: "Connector Header Through Hole 14 position 0.118\" (3.00mm)", Current Rating=-, Insulation Color=Black, Manufacturer="Molex, LLC", Manufacturer Part Number=0430451427, Material Flammability Rating="UL94 V-0", Supplier Part Number 1=WM10707-ND, Applications="General Purpose, Medical, Military, Telecommunications", Category="Connectors, Interconnects", ComponentLink1Description=https://www.molex.com/pdm_docs/sd/430451427_sd.pdf, ComponentLink1URL=https://www.molex.com/pdm_docs/sd/430451427_sd.pdf, Connector Type=Header, Contact Finish - Mating=Tin, Contact Finish - Post=Tin, Contact Finish Thickness - Mating="60.0μin (1.52μm)", Contact Finish Thickness - Post=-, Contact Length - Mating=-, Contact Length - Post="0.125\" (3.18mm)", Contact Material=Brass, Contact Shape=Square, Contact Type="Male Pin", Fastening Type="Locking Ramp", Features="Board Guide", Ingress Protection=-, Insulation Height="0.390\" (9.91mm)", Insulation Material="Liquid Crystal Polymer (LCP), Glass Filled", Mated Stacking Heights=-, Mounting Type="Through Hole", Number of Positions=14, Number of Positions Loaded=All, Number of Rows=2, Operating Temperature=-, Overall Contact Length=-, Packaging=Tray, Part Status=Active, Pitch - Mating="0.118\" (3.00mm)", Pricing 1="1=4.57, 10=4.377, 25=4.0124, 50=3.8296, 100=3.6473, 250=3.1914, 936=2.82666, 1872=2.5531, 2808=2.46192 (CAD)", RoHS="RoHS Compliant", Row Spacing - Mating="0.118\" (3.00mm)", Shrouding="Shrouded - 4 Wall", Stock 1=829, Style="Board to Cable/Wire", Supplier 1=Digi-Key, Termination=Solder, Voltage Rating=-
P4: "Connector Header Through Hole 3 position 0.118\" (3.00mm)", Insulation Color=Black, Material Flammability Rating="UL94 V-0", Supplier Part Number 1=WM1918-ND, Connector Type=Header, Contact Finish=Tin, Contact Finish Thickness="100.0μin (2.54μm)", Contact Length="0.125\" (3.18mm)", Contact Material=Brass, Contact Shape=Square, Contact Type="Male Pin", Fastening Type="Locking Ramp", Features="Board Guide", Insulation Height="0.390\" (9.91mm)", Insulation Material="Liquid Crystal Polymer (LCP), Glass Filled", Mated Stacking Heights=17.56mm, Mounting Type="Through Hole", Number of Positions=3, Number of Positions Loaded=All, Number of Rows=1, Packaging=Tray, Part Status=Active, Shrouding Shrouded="4 Wall", Style="Board to Cable/Wire", Supplier 1=Digi-Key, Termination Kinked Pin=Solder
P5: "Connector Header Through Hole 6 position 0.118\" (3.00mm)", Supplier Part Number 1=WM10673-ND, ComponentLink1Description=http://www.literature.molex.com/SQLImages/kelmscott/Molex/PDF_Images/987650-5984.pdf, ComponentLink1URL=http://www.literature.molex.com/SQLImages/kelmscott/Molex/PDF_Images/987650-5984.pdf, ComponentLink2Description=https://www.molex.com/pdm_docs/ps/PS-43045.pdf, ComponentLink2URL=https://www.molex.com/pdm_docs/ps/PS-43045.pdf, ComponentLink3Description=https://www.molex.com/pdm_docs/sd/430450627_sd.pdf, ComponentLink3URL=https://www.molex.com/pdm_docs/sd/430450627_sd.pdf, Supplier 1=Digi-Key
P6 P8 P9: "Micro-Fit 3.0 Vertical Header, 3.00mm Pitch, Dual Row, 4 Circuits, with PCB Polarizing Peg, Tin, Glow-Wire Capable, Black", Color=Black, Contact Resistance=10mR, Current Rating=-, Manufacturer="Molex, LLC", Manufacturer Part Number=430450427, Material Flammability Rating="UL94 V-0", Max Operating Temperature=105°C, Min Operating Temperature=-40°C, Package Quantity=2232, Supplier Part Number 1=WM10667-ND, Applications="General Purpose, Medical, Military, Telecommunications", Category="Connectors, Interconnects", ComponentLink4Description=http://www.molex.com/webdocs/datasheets/pdf/en-us/0430450427_PCB_HEADERS.pdf, ComponentLink4URL=http://www.molex.com/webdocs/datasheets/pdf/en-us/0430450427_PCB_HEADERS.pdf, Connector Type=Header, Contact Finish - Mating=Tin, Contact Finish - Post=Tin, Contact Finish Thickness - Mating="60.0μin (1.52μm)", Contact Finish Thickness - Post=-, Contact Length - Mating=-, Contact Length - Post="0.125\" (3.18mm)", Contact Material=Brass, Contact Plating=Tin, Contact Shape=Square, Contact Type="Male Pin", Depth=8.77mm, Fastening Type="Locking Ramp", Features="Board Guide", Housing Color=Black, Housing Material=Polymer, Ingress Protection=-, Insulation Color=Black, Insulation Height="0.390\" (9.91mm)", Insulation Material="Liquid Crystal Polymer (LCP), Glass Filled", Length=10.15mm, Mated Stacking Heights=-, Mount="Through Hole", Mounting Type="Through Hole", Number of Contacts=4, Number of Ports=1, Number of Positions=6, Number of Positions Loaded=All, Number of Rows=2, Number of Terminals=4, Operating Temperature=-, Orientation=Straight, Overall Contact Length=-, Packaging=Tray, Part Status=Active, Pitch=3mm, Pitch - Mating="0.118\" (3.00mm)", RoHS="RoHS Compliant", Row Spacing=0.118inch, Row Spacing - Mating="0.118\" (3.00mm)", Shrouding="Shrouded - 4 Wall", Style="Board to Cable/Wire", Supplier 1=Digi-Key, Termination=Solder, Voltage Rating=-
P7: "Connector Header Through Hole 2 position", Contact Resistance=10mR, Current Rating=5A, Housing Colour=Black, Manufacturer=Molex, Manufacturer Part Number=43045-0227, Max Operating Temperature=105°C, Max Voltage Rating (DC)=250.25kV, Min Operating Temperature=-40°C, Package Quantity=3168, Supplier Part Number 1=WM10657-ND, Voltage Rating=600V, ComponentLink1Description=http://www.onlinecomponents.com/productFiles/mf-MOL/307170430450227_pcb_headers.pdf, ComponentLink1URL=http://www.onlinecomponents.com/productFiles/mf-MOL/307170430450227_pcb_headers.pdf, ComponentLink2Description=http://www.mouser.com/ds/2/276/0430450227_PCB_HEADERS-142611.pdf, ComponentLink2URL=http://www.mouser.com/ds/2/276/0430450227_PCB_HEADERS-142611.pdf, ComponentLink3Description=http://uk.rs-online.com/webdocs/13c3/0900766b813c3a46.pdf, ComponentLink3URL=http://uk.rs-online.com/webdocs/13c3/0900766b813c3a46.pdf, ComponentLink4Description=http://www.molex.com/webdocs/datasheets/pdf/en-us/0430450227_PCB_HEADERS.pdf, ComponentLink4URL=http://www.molex.com/webdocs/datasheets/pdf/en-us/0430450227_PCB_HEADERS.pdf, Contact Material=Brass, Contact Plating=Tin, Depth=8.77mm, Gender=Male, Glow Wire Compliant=Compliant, Halogen Free="Low Halogen", Housing Material=Thermoplastic, Length=7.15mm, Mount="Through Hole", Number of Circuits=2, Number of Contacts=2, Number of Ports=1, Number of Positions=2, Number of Rows=2, Number of Terminals=2, Orientation=Vertical, Packaging=Tray, Pitch=3mm, Pricing 1="1=0.84, 10=0.74, 25=0.6968, 50=0.6676, 100=0.6387, 250=0.5806, 500=0.52254, 1000=0.46448, 2500=0.42094 (USD)", Radiation Hardening=No, Row Spacing=3mm, Stock 1=3657, Supplier 1=Digi-Key, Termination=Solder
R1 R7 R8 R16 R17 R28 R29 R39 R40 R47 R48 R50 R51 R53 R54: "4.7k Ohm ±1% 0.1W, 1/10W Chip Resistor 0603 (1608 Metric) Moisture Resistant Thick Film", Manufacturer 1=Yageo, Manufacturer Part Number 1=RC0603FR-074K7L, Operating Temperature="-55°C ~ 155°C", Package / Case="0603 (1608 Metric)", Power (Watts)=1/10W, Resistance (Ohms)=4.7k, Supplier Device Package=0603, Supplier Part Number 1=311-4.70KHRCT-ND, Temperature Coefficient=±100ppm/°C, Tolerance=±1%, Category=Resistors, ComponentLink1Description=http://www.yageo.com/documents/recent/PYu-RC_Group_51_RoHS_L_7.pdf, ComponentLink1URL=http://www.yageo.com/documents/recent/PYu-RC_Group_51_RoHS_L_7.pdf, Composition="Thick Film", Description 1="RES SMD 4.7K OHM 1% 1/10W 0603", Failure Rate=-, Features="Moisture Resistant", Height - Seated (Max)="0.022\" (0.55mm)", Packaging="Cut Tape (CT)", Part Status=Active, Pricing 1="1=0.16, 10=0.022, 100=0.0089, 1000=0.00402, 2500=0.00349 (CAD)", RoHS="RoHS Compliant", Size / Dimension="0.063\" L x 0.031\" W (1.60mm x 0.80mm)", Stock 1=3487566, Supplier 1=Digi-Key
R3 R4 R20 R22 R23 R33 R35: "4.7k Ohm ±5% 62.5mW Power Per Element Isolated 4 Resistor Network/Array ±200ppm/°C 1206 (3216 Metric), Convex, Long Side Terminals", Number of Resistors=4, Operating Temperature="-55°C ~ 125°C", Package / Case="1206 (3216 Metric), Convex, Long Side Terminals", Power Per Element=62.5mW, Resistance (Ohms)=4.7k, Resistor-Ratio-Drift=-, Supplier Device Package=1206, Supplier Part Number 1=Y9472CT-ND, Temperature Coefficient=±200ppm/°C, Tolerance=±5%, Applications=-, Applications Automotive=AEC-Q200, Category=Resistors, Circuit Type=Isolated, ComponentLink1Description=https://industrial.panasonic.com/cdbs/www-data/pdf/AOC0000/AOC0000C14.pdf, ComponentLink1URL=https://industrial.panasonic.com/cdbs/www-data/pdf/AOC0000/AOC0000C14.pdf, Height - Seated (Max)="0.024\" (0.60mm)", Mounting Type="Surface Mount", Number of Pins=8, Packaging="Cut Tape (CT)", Part Status=Active, Resistor Matching Ratio=-, Series=EXB, Size / Dimension="0.126\" L x 0.063\" W (3.20mm x 1.60mm)", Supplier 1=Digi-Key
R5 R6 R9 R10 R12 R24 R26 R27 R36 R37 R38 R44 R45 R46: "47 kOhms ±1% 0.1W, 1/10W Chip Resistor 0603 (1608 Metric) Automotive AEC-Q200 Thick Film", Case/Package=0603, Case Code (Metric)=1608, Manufacturer=Panasonic, Manufacturer Part Number=ERJ3EKF4702V, Max Operating Temperature=155°C, Max Power Dissipation=100mW, Min Operating Temperature=-55°C, Package Quantity=1, Power Rating=1/10W, Resistance=47k, Supplier Part Number 1=P47.0KHCT-ND, Temperature Coefficient=100ppm/°C, Tolerance=1%, Voltage Rating=75V, Working Voltage=6V, Case Code (Imperial)=0603, ComponentLink1Description=https://industrial.panasonic.com/cdbs/www-data/pdf/RDO0000/AOA0000C291.pdf, ComponentLink1URL=https://industrial.panasonic.com/cdbs/www-data/pdf/RDO0000/AOA0000C291.pdf, ComponentLink2Description=https://datasheet.ciiva.com/6138/aoa0000ce2-6138149.pdf?src-supplier=Farnell, ComponentLink2URL=https://datasheet.ciiva.com/6138/aoa0000ce2-6138149.pdf?src-supplier=Farnell, ComponentLink3Description=https://datasheet.ciiva.com/7802/aoa0000ce2-7802421.pdf?src-supplier=Element14, ComponentLink3URL=https://datasheet.ciiva.com/7802/aoa0000ce2-7802421.pdf?src-supplier=Element14, ComponentLink4Description=https://datasheet.ciiva.com/48531/aoa0000ce2-48531029.pdf?src-supplier=Avnet, ComponentLink4URL=https://datasheet.ciiva.com/48531/aoa0000ce2-48531029.pdf?src-supplier=Avnet, ComponentLink5Description=https://datasheet.ciiva.com/16514/aoa0000ce2-16514071.pdf?src-supplier=Avnet+Asia, ComponentLink5URL=https://datasheet.ciiva.com/16514/aoa0000ce2-16514071.pdf?src-supplier=Avnet+Asia, ComponentLink6Description=https://datasheet.ciiva.com/46398/1678782-46398088.pdf?src-supplier=Element14, ComponentLink6URL=https://datasheet.ciiva.com/46398/1678782-46398088.pdf?src-supplier=Element14, ComponentLink7Description=https://datasheet.ciiva.com/24069/aoa0000ce2-24069209.pdf?src-supplier=Mouser, ComponentLink7URL=https://datasheet.ciiva.com/24069/aoa0000ce2-24069209.pdf?src-supplier=Mouser, ComponentLink8Description=https://datasheet.ciiva.com/46398/1678782-46398089.pdf?src-supplier=Element14, ComponentLink8URL=https://datasheet.ciiva.com/46398/1678782-46398089.pdf?src-supplier=Element14, ComponentLink9Description=https://datasheet.ciiva.com/30236/aoa0000ce2-30236698.pdf?src-supplier=Onlinecomponents.com, ComponentLink9URL=https://datasheet.ciiva.com/30236/aoa0000ce2-30236698.pdf?src-supplier=Onlinecomponents.com, ComponentLink10Description=https://datasheet.ciiva.com/22722/426256-22722781.pdf?src-supplier=Element14, ComponentLink10URL=https://datasheet.ciiva.com/22722/426256-22722781.pdf?src-supplier=Element14, ComponentLink11Description=https://datasheet.ciiva.com/16758/70260748-16758831.pdf?src-supplier=Allied+Electronics, ComponentLink11URL=https://datasheet.ciiva.com/16758/70260748-16758831.pdf?src-supplier=Allied+Electronics, Composition="Thick Film", Contact Plating=Tin, Depth=0.8mm, Features="Automotive AEC-Q200", Height=0.022inch, Lead Free="Lead Free", Length=1.6mm, Military Standard=Not, Mount="Surface Mount", Number of Pins=2, Number of Terminations=2, Packaging="Tape and Reel", Pricing 1="1 = 0.100000, 10 = 0.065000, 100 = 0.026400, 1000 = 0.011860, 2500 = 0.010290 (USD)", Radiation Hardening=No, REACH SVHC="No SVHC", RoHS=Yes, Stock 1=1704740, Supplier 1=Digi-Key, Termination=SMD/SMT, Voltage Rating (DC)=75V, Width=0.031inch
R11 R14 R15 R18 R21 R25 R30 R31 R34 R41 R42: "RES SMD 10K OHM 1% 1/10W 0603", Manufacturer 1=Yageo, Manufacturer Part Number 1=RC0603FR-0710KL, Operating Temperature="-55°C ~ 155°C", Package / Case="0603 (1608 Metric)", Power=1/10W, Resistance=10k, Supplier Device Package=0603, Supplier Part Number 1=311-10.0KHRCT-ND, Temperature Coefficient=±100ppm/°C, Tolerance=±1%, ComponentLink1Description=http://www.yageo.com/documents/recent/PYu-RC_Group_51_RoHS_L_7.pdf, ComponentLink1URL=http://www.yageo.com/documents/recent/PYu-RC_Group_51_RoHS_L_7.pdf, Composition="Thick Film", Failure Rate=-, Height - Seated (Max)="0.022\" (0.55mm)", Packaging="Cut Tape (CT)", Part Status=Active, Size / Dimension="0.063\" L x 0.031\" W (1.60mm x 0.80mm)", Supplier 1=Digi-Key
R13 R19 R32 R43 R49 R52 R55: "1.21k Ohm ±1% 0.1W, 1/10W Chip Resistor 0603 (1608 Metric) Moisture Resistant Thick Film", Manufacturer 1=Yageo, Manufacturer Part Number 1=RC0603FR-071K21L, Operating Temperature="-55°C ~ 155°C", Package / Case="0603 (1608 Metric)", Power=1/10W, Resistance=1.21k, Supplier Device Package=0603, Supplier Part Number 1=311-1.21KHRCT-ND, Temperature Coefficient=±100ppm/°C, Tolerance=±1%, ComponentLink1Description=http://www.yageo.com/documents/recent/PYu-RC_Group_51_RoHS_L_7.pdf, ComponentLink1URL=http://www.yageo.com/documents/recent/PYu-RC_Group_51_RoHS_L_7.pdf, Composition="Thick Film", Failure Rate=-, Height - Seated (Max)="0.022\" (0.55mm)", Packaging="Cut Tape (CT)", Part Status=Active, Size / Dimension="0.063\" L x 0.031\" W (1.60mm x 0.80mm)", Supplier 1=Digi-Key
TP8: Case/Package=0603, Case Code (Metric)=1608, Colour=Natural, Manufacturer 1="TE Connectivity", Manufacturer Part Number 1=1625854-3, Max Operating Temperature=125°C, Min Operating Temperature=-55°C, Package Quantity=2000, Resistance=0mR, Supplier Part Number 1=A106145CT-ND, Case Code (Imperial)=0603, ComponentLink1Description=https://datasheet.ciiva.com/30100/1773266-a-30100967.pdf, ComponentLink1URL=https://datasheet.ciiva.com/30100/1773266-a-30100967.pdf, ComponentLink2Description=https://datasheet.ciiva.com/8914/eng-ds-1773266-a-8914634.pdf, ComponentLink2URL=https://datasheet.ciiva.com/8914/eng-ds-1773266-a-8914634.pdf, ComponentLink3Description=https://datasheet.ciiva.com/6439/eng-ds-1773266-a-6439163.pdf, ComponentLink3URL=https://datasheet.ciiva.com/6439/eng-ds-1773266-a-6439163.pdf, ComponentLink4Description=https://datasheet.ciiva.com/6439/eng-ds-1773266-a-6439164.pdf, ComponentLink4URL=https://datasheet.ciiva.com/6439/eng-ds-1773266-a-6439164.pdf, ComponentLink5Description=https://datasheet.ciiva.com/6439/eng-ds-1773266-a-6439165.pdf, ComponentLink5URL=https://datasheet.ciiva.com/6439/eng-ds-1773266-a-6439165.pdf, Depth=0.8mm, Description 1="Thick Film Resistors - SMD 2000", Height=1.15mm, Length=1.6mm, Military Standard=Not, Mount="Surface Mount", Packaging="Tape and Reel", Pricing 1="1=0.22, 10=0.211, 25=0.18, 50=0.1574, 100=0.1462, 250=0.12932, 500=0.12368, 1000=0.1012 (USD)", Radiation Hardening=No, Stock 1=212628, Supplier 1=Digi-Key, Termination=SMD/SMT, Width=0.8mm
U1: "Power Switch/Driver 1:1 N-Channel 11A PG-TSDSO-14-22", Manufacturer=Infineon, Manufacturer Part Number=BTS70081EPPXUMA1CT-ND, ComponentLink1Description=https://media.digikey.com/pdf/Data%20Sheets/Infineon%20PDFs/BTS7008-1EPP_v1.03_4-29-19.pdf, ComponentLink1URL=https://media.digikey.com/pdf/Data%20Sheets/Infineon%20PDFs/BTS7008-1EPP_v1.03_4-29-19.pdf, RoHS=YES, Supplier 1=Digi-Key, Supplier Part Number 1=BTS70081EPPXUMA1CT-ND
U2 U3 U6 U8: "Power Switch/Driver 1:1 N-Channel 1.2A PG-TSDSO-14-22", Manufacturer=Infineon, Manufacturer Part Number=BTS72002EPAXUMA1, Supplier Part Number 1=BTS72002EPAXUMA1CT-ND, ComponentLink1Description=https://www.infineon.com/dgdl/Infineon-BTS7200-2EPA-DS-v01_00-EN.pdf?fileId=5546d462636cc8fb016421e548a61215, ComponentLink1URL=https://www.infineon.com/dgdl/Infineon-BTS7200-2EPA-DS-v01_00-EN.pdf?fileId=5546d462636cc8fb016421e548a61215, Pricing 1="1=1.31000, 10=1.17500, 100=0.91640, 500=0.75700, 1000=0.59763 (USD)", RoHS=No, Stock 1=1973, Supplier 1=Digi-Key
U4 U5: "Power Switch/Driver 1:1 N-Channel 4.5A PG-TSDSO-14-22", Manufacturer=Infineon, Manufacturer Part Number=BTS70401EPAXUMA1, Supplier Part Number 1=BTS70401EPAXUMA1CT-ND, ComponentLink1Description=https://www.infineon.com/dgdl/Infineon-BTS7040-1EPA-DS-v01_00-EN.pdf?fileId=5546d462636cc8fb0163fe8f965308bc, ComponentLink1URL=https://www.infineon.com/dgdl/Infineon-BTS7040-1EPA-DS-v01_00-EN.pdf?fileId=5546d462636cc8fb0163fe8f965308bc, Supplier 1=Digi-Key

## Free pads (board coordinates)
  round 2.7 hole 2.7: ""(2.5,2.5) ""(2.5,87.5) ""(44.5,2.3) ""(44.5,27.3) ""(74.5,87.5) ""(74.5,2.5) ""(74.5,27.5)

## Via types
v1: diameter 0.6, hole 0.3, Top Layer to Bottom Layer, tented both sides, 547 vias

## Nets (pads, with @x,y where several pads share a name; then routed paths per layer and width w, separated by ;. In a path a pad name is that pad's centre, name@x,y a point inside that pad or via, vN(x,y) a via of type N, cw(c..) or ccw(c..) an arc to the next point about the centre after c; other vN are vias at no path point)
3V3: P1.40 P1.41 P1.42 P1.43 P1.44 P1.45 R3.3 R4.2 R20.2 R22.3 R23.2 R33.3 R35.2 | length 147.6
  Top Layer w0.254: v1(6.5,52.1) 6.51,52.11 8.29,52.11 R33.3 ; v1(19.6,62) R35.2 ; v1(23.8,10.9) R22.3 ; v1(33,62) 33.05,62.05 33.05,62.75 R23.2 ; v1(43.1,15.9) 43.2,16 P1.40 P1.41 P1.42 P1.43 P1.44 P1.45 ; v1(44.3,32) 44.366,32.066 44.366,34.366 46.077,36.077 48.577,36.077 R3.3 48.795,36.295 48.895,36.295 49.071,36.471 49.166,36.471 49.4,36.705 v1(49.4,40.7) ; v1(47.2,45.8) 47.2,46.763 47.737,47.3 R20.2 49.3,47.3 49.571,47.571 49.571,50.171 v1(49.6,50.2) ; v1(54.9,61.5) R4.2
  Bottom Layer w0.254: v1(6.5,52.1) 6.5,56.3 12.2,62 v1(19.6,62) v1(33,62) 33.4,62.4 54.834,62.4 ; v1(23.8,10.9) 38.6,10.9 43.1,15.4 v1(43.1,15.9) 43.1,21.337 42.3,22.137 42.3,30 v1(44.3,32) ; v1(47.2,45.8) 47.2,43.4 49.4,41.2 v1(49.4,40.7) ; v1(49.6,50.2) 49.6,52.2 57.4,60 57.4,61.663 56.663,62.4 54.9,62.4 v1(54.9,61.5)
Center_Console_PWR: C19.1 LED11.1 P5.3 R37.1 U8.8 U8.9 U8.10 | length 1.8
  Top Layer w0.254: U8.8 23.69,72.75 LED11.1
Daytime_PWR: C21.1 LED6.1 P2.3 P2.4 R46.1 U4.12 U4.13 U4.14 | length 1.8
  Top Layer w0.254: LED6.1 58.89,48.21 U4.14
Driver_Display_PWR: C23.1 LED10.1 P7.1 R45.1 U5.12 U5.13 U5.14 | length 1.6
  Top Layer w0.254: U5.14 18.3,52.344 LED10.1
Fan_PWR: C18.1 LED12.1 P4.3 R36.1 U8.12 U8.13 U8.14 | length 2
  Top Layer w0.254: LED12.1 18,72.7 U8.14
Front_Left_Turn_Light_PWR: C6.1 LED4.1 P8.1 P8.2 R5.1 U2.12 U2.13 U2.14 | length 2
  Top Layer w0.254: LED4.1 53.2,72.6 U2.14
Front_Right_Turn_Light_PWR: C8.1 LED5.1 P9.1 P9.2 R9.1 U2.8 U2.9 U2.10 | length 2.2
  Top Layer w0.254: U2.8 59.25,72.55 LED5.1
GND: C1.2 C2.2 C3.2 C4.2 C5.2 C6.2 C7.2 C8.2 C9.2 C10.2 C11.2 C12.2 C13.2 C14.2 C15.2 C16.2 C17.2 C18.2 C19.2 C20.2 C21.2 C22.2 C23.2 C24.2 D1.1 D2.1 D3.1 D4.1 D5.1 D6.1 D7.1 LED1.2 P1.1 P1.2 P1.3 P1.4 P1.26 P1.27 P1.28 P1.29 P2.5 P2.6 P2.7 P2.8 P3.8 P3.9 P3.10 P3.11 P3.12 P3.13 P3.14 P4.1 P5.4 P5.5 P5.6 P6.3 P6.4 P7.2 P8.3 P8.4 P9.3 P9.4 R5.2 R6.2 R9.2 R10.2 R11.2 R12.2 R13.2 R14.2 R15.2 R18.2 R19.2 R20.1 R21.2 R22.1 R24.2 R25.2 R26.2 R27.2 R30.2 R31.2 R32.2 R33.1 R34.2 R36.2 R37.2 R38.2 R41.2 R42.2 R43.2 R44.2 R45.2 R46.2 R49.2 R52.2 R55.2 TP8.1 | length 17.1
  Top Layer w0.254: R41.2 27.9,76.375 R31.2@28,76.275 ; R30.2 47.9,76.175 R15.2 ; P1.26 P1.27 P1.28 P1.29 ; v1(45.9,30.3) 46.875,30.3 R13.2 ; R11.2 49.729,32.4 v1(51.5,32.4) ; P1.4 P1.3 P1.2 P1.1
  other v1: 12.5,5.2 13.3,5.2 14.1,5.2 14.9,5.2 15.7,5.2 16.5,5.2 17.3,5.2 12.1,5.8 12.9,5.8 13.7,5.8 14.5,5.9 15.3,5.9 16.1,5.9 16.9,5.9 17.7,5.9 11.7,6.5 12.5,6.5 13.3,6.5 14.1,6.5 14.9,6.5 15.7,6.5 16.5,6.5 17.3,6.5 18.1,6.5 12.1,7.2 12.9,7.2 13.7,7.2 14.5,7.2 15.3,7.2 16.1,7.2 16.9,7.2 17.7,7.2 14.1,7.8 14.9,7.8 15.7,7.8 16.5,7.8 17.3,7.8 18.1,7.8 11.7,7.9 12.5,7.9 13.3,7.9 12.1,8.5 12.9,8.5 13.7,8.5 14.5,8.5 15.3,8.5 16.1,8.5 16.9,8.5 17.7,8.5 43.4,9.8 3.9,17.8 4.6,17.8 3.3,18.2 3.9,18.6 3.3,19 3.9,19.4 3.3,19.8 3.9,20.2 3.3,20.6 3.9,20.9 4.6,20.9 3.3,21.3 3.9,21.6 3.3,22.1 3.9,22.4 63.7,22.5 64.5,22.5 65.3,22.5 66.1,22.5 66.9,22.5 67.7,22.5 68.5,22.5 3.3,22.9 3.9,23.1 63.3,23.1 64.1,23.1 64.9,23.1 65.7,23.2 66.5,23.2 67.3,23.2 68.1,23.2 68.9,23.2 3.3,23.7 3.9,23.8 4.6,23.8 62.9,23.8 63.7,23.8 64.5,23.8 65.3,23.8 66.1,23.8 66.9,23.8 67.7,23.8 68.5,23.8 69.3,23.8 32.4,24.3 33.2,24.3 34,24.3 34.8,24.3 35.6,24.3 36.4,24.3 37.2,24.3 63.3,24.5 64.1,24.5 64.9,24.5 65.7,24.5 66.5,24.5 67.3,24.5 68.1,24.5 68.9,24.5 3.9,24.6 32,24.9 32.8,24.9 33.6,24.9 3.3,25 34.4,25 35.2,25 36,25 36.8,25 37.6,25 65.3,25.1 66.1,25.1 66.9,25.1 67.7,25.1 68.5,25.1 69.3,25.1 62.9,25.2 63.7,25.2 64.5,25.2 3.9,25.3 31.6,25.6 32.4,25.6 33.2,25.6 34,25.6 34.8,25.6 35.6,25.6 36.4,25.6 37.2,25.6 38,25.6 3.3,25.8 63.3,25.8 64.1,25.8 64.9,25.8 65.7,25.8 66.5,25.8 67.3,25.8 68.1,25.8 68.9,25.8 3.9,26 32,26.3 32.8,26.3 33.6,26.3 34.4,26.3 35.2,26.3 36,26.3 36.8,26.3 37.6,26.3 63.8,26.5 64.6,26.5 65.4,26.5 66.2,26.5 67,26.5 67.8,26.5 68.6,26.5 3.3,26.6 3.9,26.8 4.6,26.8 34,26.9 34.8,26.9 35.6,26.9 36.4,26.9 37.2,26.9 38,26.9 31.6,27 32.4,27 33.2,27 63.4,27.1 64.2,27.1 65,27.1 65.8,27.2 66.6,27.2 67.4,27.2 68.2,27.2 69,27.2 3.3,27.4 3.9,27.6 32,27.6 32.8,27.6 33.6,27.6 34.4,27.6 35.2,27.6 36,27.6 36.8,27.6 37.6,27.6 63,27.8 63.8,27.8 64.6,27.8 65.4,27.8 66.2,27.8 67,27.8 67.8,27.8 68.6,27.8 69.4,27.8 3.9,28.3 32.5,28.3 33.3,28.3 34.1,28.3 34.9,28.3 35.7,28.3 36.5,28.3 37.3,28.3 63.4,28.5 64.2,28.5 65,28.5 65.8,28.5 66.6,28.5 67.4,28.5 68.2,28.5 69,28.5 3.3,28.7 32.1,28.9 32.9,28.9 33.7,28.9 3.9,29 34.5,29 35.3,29 36.1,29 36.9,29 37.7,29 53.5,29.1 65.4,29.1 66.2,29.1 67,29.1 67.8,29.1 68.6,29.1 69.4,29.1 63,29.2 63.8,29.2 64.6,29.2 3.3,29.5 31.7,29.6 32.5,29.6 33.3,29.6 34.1,29.6 34.9,29.6 35.7,29.6 36.5,29.6 37.3,29.6 38.1,29.6 52.2,29.7 53,29.7 53.8,29.7 3.9,29.8 4.6,29.8 63.4,29.8 64.2,29.8 65,29.8 65.8,29.8 66.6,29.8 67.4,29.8 68.2,29.8 69,29.8 3.3,30.3 32.1,30.3 32.9,30.3 33.7,30.3 34.5,30.3 35.3,30.3 36.1,30.3 36.9,30.3 37.7,30.3 52.6,30.3 53.4,30.3 3.9,30.5 34.1,30.9 34.9,30.9 35.7,30.9 36.5,30.9 37.3,30.9 38.1,30.9 31.7,31 32.5,31 33.3,31 3.3,31.1 3.9,31.2 32.1,31.6 32.9,31.6 33.7,31.6 34.5,31.6 35.3,31.6 36.1,31.6 36.9,31.6 37.7,31.6 3.9,32 3.3,32.4 3.9,32.7 4.6,32.7 3.3,33.2 3.9,33.5 3.3,34 3.9,34.2 3.3,34.8 24.5,34.8 25.3,34.8 26.1,34.8 75.2,38.1 74.6,38.5 75.2,38.9 74.6,39.3 75.2,39.7 74.6,40.1 75.3,40.5 74.6,40.9 75.3,41.3 74.6,41.7 75.3,42.1 74.6,42.5 62.3,42.9 63.1,42.9 63.9,42.9 75.3,42.9 74.6,43.3 62.7,43.5 63.5,43.5 75.3,43.7 74.6,44.1 75.3,44.5 27.2,45.6 28,45.6 28.8,45.6 67.6,64.2 68.4,64.2 69.2,64.2 70,64.2 70.8,64.2 71.6,64.2 72.4,64.2 67.2,64.8 68,64.8 68.8,64.8 69.6,64.9 70.4,64.9 71.2,64.9 72,64.9 72.8,64.9 66.8,65.5 67.6,65.5 68.4,65.5 69.2,65.5 70,65.5 70.8,65.5 71.6,65.5 72.4,65.5 73.2,65.5 67.2,66.2 68,66.2 68.8,66.2 69.6,66.2 70.4,66.2 71.2,66.2 72,66.2 72.8,66.2 69.2,66.8 70,66.8 70.8,66.8 71.6,66.8 72.4,66.8 73.2,66.8 66.8,66.9 67.6,66.9 68.4,66.9 67.2,67.5 68,67.5 68.8,67.5 69.6,67.5 70.4,67.5 71.2,67.5 72,67.5 72.8,67.5 67.7,68.2 68.5,68.2 69.3,68.2 70.1,68.2 70.9,68.2 71.7,68.2 72.5,68.2 67.3,68.8 68.1,68.8 68.9,68.8 69.7,68.9 70.5,68.9 71.3,68.9 72.1,68.9 72.9,68.9 66.9,69.5 67.7,69.5 68.5,69.5 69.3,69.5 70.1,69.5 70.9,69.5 71.7,69.5 72.5,69.5 73.3,69.5 67.3,70.2 68.1,70.2 68.9,70.2 69.7,70.2 70.5,70.2 71.3,70.2 72.1,70.2 72.9,70.2 69.3,70.8 70.1,70.8 70.9,70.8 71.7,70.8 72.5,70.8 73.3,70.8 66.9,70.9 67.7,70.9 68.5,70.9 67.3,71.5 68.1,71.5 68.9,71.5 69.7,71.5 70.5,71.5 71.3,71.5 72.1,71.5 72.9,71.5 47.2,87.8 48,87.8 48.8,87.8 49.6,87.8 50.4,87.8 51.2,87.8 29.4,87.9 30.2,87.9 31,87.9 31.8,87.9 32.6,87.9 33.4,87.9 44.8,87.9 45.6,87.9 46.4,87.9 61.6,87.9 62.4,87.9 63.2,87.9 64,87.9 64.8,87.9 65.6,87.9 27,88 27.8,88 28.6,88 59.2,88 60,88 60.8,88 45.2,88.5 46,88.5 46.8,88.5 47.6,88.5 48.4,88.5 49.2,88.5 50,88.5 50.8,88.5 27.4,88.6 28.2,88.6 29,88.6 29.8,88.6 30.6,88.6 31.4,88.6 32.2,88.6 33,88.6 59.6,88.6 60.4,88.6 61.2,88.6 62,88.6 62.8,88.6 63.6,88.6 64.4,88.6 65.2,88.6
Horns_PWR: C22.1 LED7.1 P6.1 P6.2 R44.1 U1.8 U1.9 U1.10 U1.12 U1.13 U1.14 | length 2.1
  Top Layer w0.254: LED7.1 23.1,21.7 U1.14
NetD1_2: D1.2 R7.1 R8.2 | length 33.8
  Top Layer w0.254: v1(43.85,36.9) 43.8,36.9 42.5,35.6 D1.2 42.5,32.6 44,31.1 48.425,31.1 R7.1@48.625,31.3 ; R8.2 56.1,26.925 v1(56.1,28)
  Bottom Layer w0.254: v1(43.85,36.9) 44.85,37.9 52.9,37.9 56.1,34.7 v1(56.1,28)
NetD2_2: D2.2 R16.1 R17.2 | length 53.9
  Top Layer w0.254: R17.2 55.775,18.8 v1(59.5,18.8) ; R16.1 D2.2 63.514,60.2 v1(65.4,60.2)
  Bottom Layer w0.254: v1(59.5,18.8) 59.5,19.6 59.5,49.9 65.4,55.8 v1(65.4,60.2)
NetD3_2: D3.2 R28.1 R29.2 | length 61.6
  Top Layer w0.254: R28.1 39.889,60.425 D3.2@39.9,60.436 ; v1(39.9,58.6) D3.2@39.9,60.436 ; D3.2 D3.2@39.9,60.436 ; R29.2 56.605,11.404 57.281,12.081 57.281,13.968 56.7,14.549 v1(56.7,16.3)
  Bottom Layer w0.254: v1(39.9,58.6) 58.394,40.106 58.394,17.994 v1(56.7,16.3)
NetD4_2: D4.2 R39.1 R40.2 | length 131
  Top Layer w0.254: v1(22,60.4) 23.775,60.4 R39.1 26.425,60.425 D4.2 ; R40.2 55.675,7.6 v1(56.9,7.6)
  Bottom Layer w0.254: v1(22,60.4) 21.081,61.319 13.219,61.319 9.4,57.5 9.4,46.463 2.4,39.463 2.4,9 8.5,2.9 38.8,2.9 42.194,6.294 55.594,6.294 v1(56.9,7.6)
NetD5_2: D5.2 R47.1 R48.2 | length 47
  Top Layer w0.254: v1(42.9,46.3) 42.9,45.1 43,45 D5.2 42.6,43.4 43.4,42.6 48.325,42.6 R47.1 ; R48.2 55.775,23 55.875,22.9 v1(57.5,22.9)
  Bottom Layer w0.254: v1(42.9,46.3) 44.6,48 49.1,48 57.5,39.6 v1(57.5,22.9)
NetD6_2: D6.2 R50.1 R51.2 | length 43.6
  Top Layer w0.254: R50.1 31.289,11.825 31.4,11.936 31.4,11.825 31.1,11.525 v1(31.1,7) ; R51.2 56.6,14.075 v1(56.6,12.7)
  Bottom Layer w0.254: v1(31.1,7) 34.6,3.5 38.1,3.5 41.6,7 54.5,7 56.6,9.1 v1(56.6,12.7)
NetD7_2: D7.2 R53.1 R54.2 | length 104.4
  Top Layer w0.254: v1(6.4,45) D7.2 D7.2@8,44.9 ; D7.2@8.325,45.225 R53.1 ; R54.2@55.365,4 55.675,4 v1(56.626,4)
  Bottom Layer w0.254: v1(6.4,45) 3.9,45 1.9,43 1.9,8.9 8.6,2.2 39.3,2.2 42.781,5.681 53.219,5.681 54.9,4 v1(56.626,4)
NetLED1_1: LED1.1 R1.2 | length 1.6
  Top Layer w0.254: R1.2 12.825,14.7 LED1.1
NetLED3_2: LED3.2 R14.1 | length 2.6
  Top Layer w0.254: LED3.2 59.775,41.85 R14.1
NetLED4_2: LED4.2 R15.1 | length 3.1
  Top Layer w0.254: R15.1 48,73.7 49.1,72.6 LED4.2
NetLED5_2: LED5.2 R18.1 | length 2.8
  Top Layer w0.254: LED5.2 61.613,73.313 61.613,74.913 R18.1
NetLED6_2: LED6.2 R21.1 | length 2.3
  Top Layer w0.254: LED6.2 59.675,51.45 R21.1
NetLED7_2: LED7.2 R25.1 | length 2.6
  Top Layer w0.254: R25.1 19.398,23.827 19.398,21.902 LED7.2
NetLED8_2: LED8.2 R30.1 | length 3
  Top Layer w0.254: LED8.2 39.41,72.81 40.4,73.8 R30.1
NetLED9_2: LED9.2 R31.1 | length 2
  Top Layer w0.254: R31.1@28.1,74.725 28.1,73.04 LED9.2
NetLED10_2: LED10.2 R34.1 | length 1.9
  Top Layer w0.254: LED10.2 20.125,55.4 R34.1
NetLED11_2: LED11.2 R41.1 | length 2.3
  Top Layer w0.254: LED11.2 25.9,73.46 25.9,74.425 R41.1@26.2,74.725
NetLED12_2: LED12.2 R42.1 | length 3.9
  Top Layer w0.254: R42.1 12.2,73.5 13,72.7 LED12.2
NetR3_5: R3.5 U3.5 | length 3.5
  Top Layer w0.254: R3.5 51.066,35.32 51.884,36.137 U3.5
NetR3_6: R3.6 U3.3 | length 3.7
  Top Layer w0.254: R3.6 50.891,36.2 52.129,37.437 U3.3
NetR3_7: R3.7 U3.2 | length 3.6
  Top Layer w0.254: R3.7 50.966,37 52.054,38.087 U3.2
NetR4_5: R4.5 U2.6 | length 2.9
  Top Layer w0.254: U2.6 56.54,66.81 56.54,64.04 R4.5
NetR4_6: R4.6 U2.5 | length 2.9
  Top Layer w0.254: R4.6 55.775,64.075 55.775,66.775 U2.5
NetR4_7: R4.7 U2.3 | length 3
  Top Layer w0.254: U2.3 54.619,66.781 54.619,64.381 54.9,64.1 R4.7
NetR4_8: R4.8 U2.2 | length 2.9
  Top Layer w0.254: U2.2 53.96,66.79 53.96,64.06 R4.8
NetR7_2: R7.2 R13.1 U3.4 | length 13.5
  Top Layer w0.254: R13.1@46.6,31.85 R13.1@46.712,31.962 ; R13.1@46.712,31.862 R13.1@46.9,32.05 ; R13.1 49.325,31.875 50.1,31.1 R7.2 51.975,31.1 54.4,33.525 54.4,36.5 54.113,36.787 U3.4
NetR10_1: R10.1 U2.1 | length 3
  Top Layer w0.254: R10.1 53.25,65.325 U2.1
NetR11_1: R11.1 U3.6 | length 3.9
  Top Layer w0.254: R11.1@50.175,33.5 52.162,35.487 U3.6
NetR12_1: R12.1 U3.1 | length 3.5
  Top Layer w0.254: R12.1 51.1,39.7 52.063,38.737 U3.1
NetR16_2: R16.2 R19.1 U2.4 | length 11.4